# Altium PCB lm7805-power-supply.PcbDoc
Units mm, origin at the board's own origin, x right, y up, seen from the top; angles counter-clockwise.
Board outline 50 x 30 mm, 2 copper layers (Top Layer, Bottom Layer), stack 1.569 mm thick; 7 components, 4 nets, 17 pads, 2 vias.
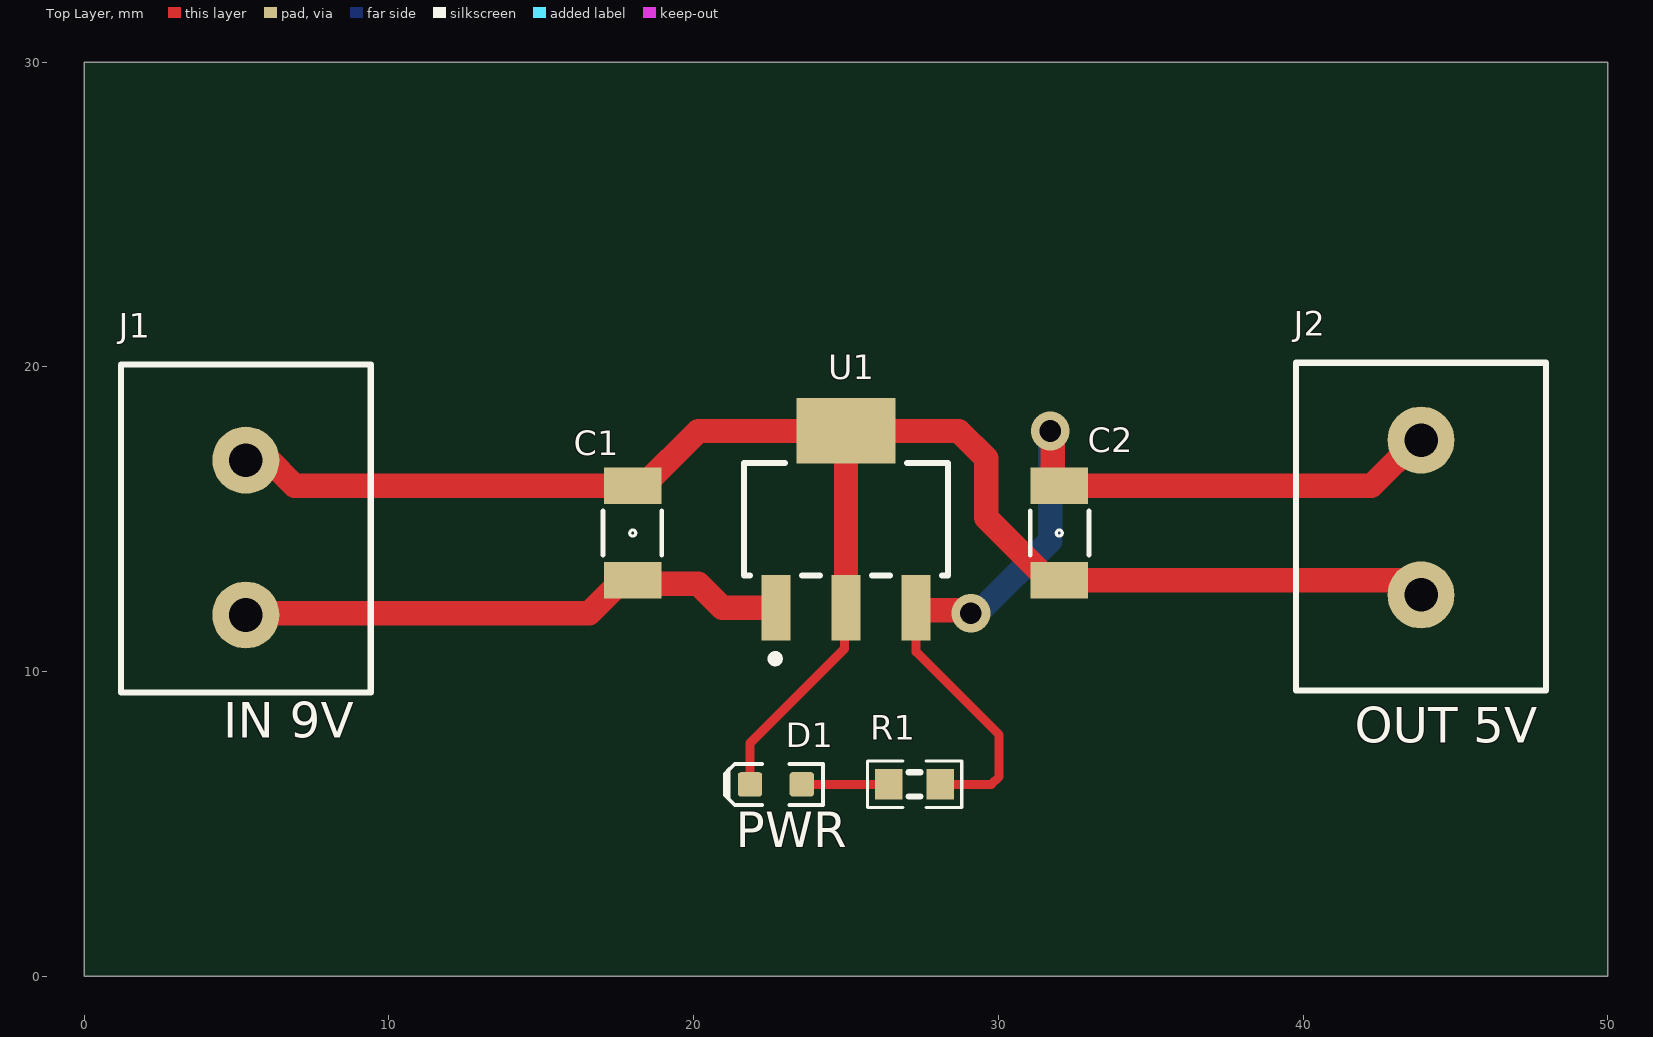
[diagram p0: Top Layer view]
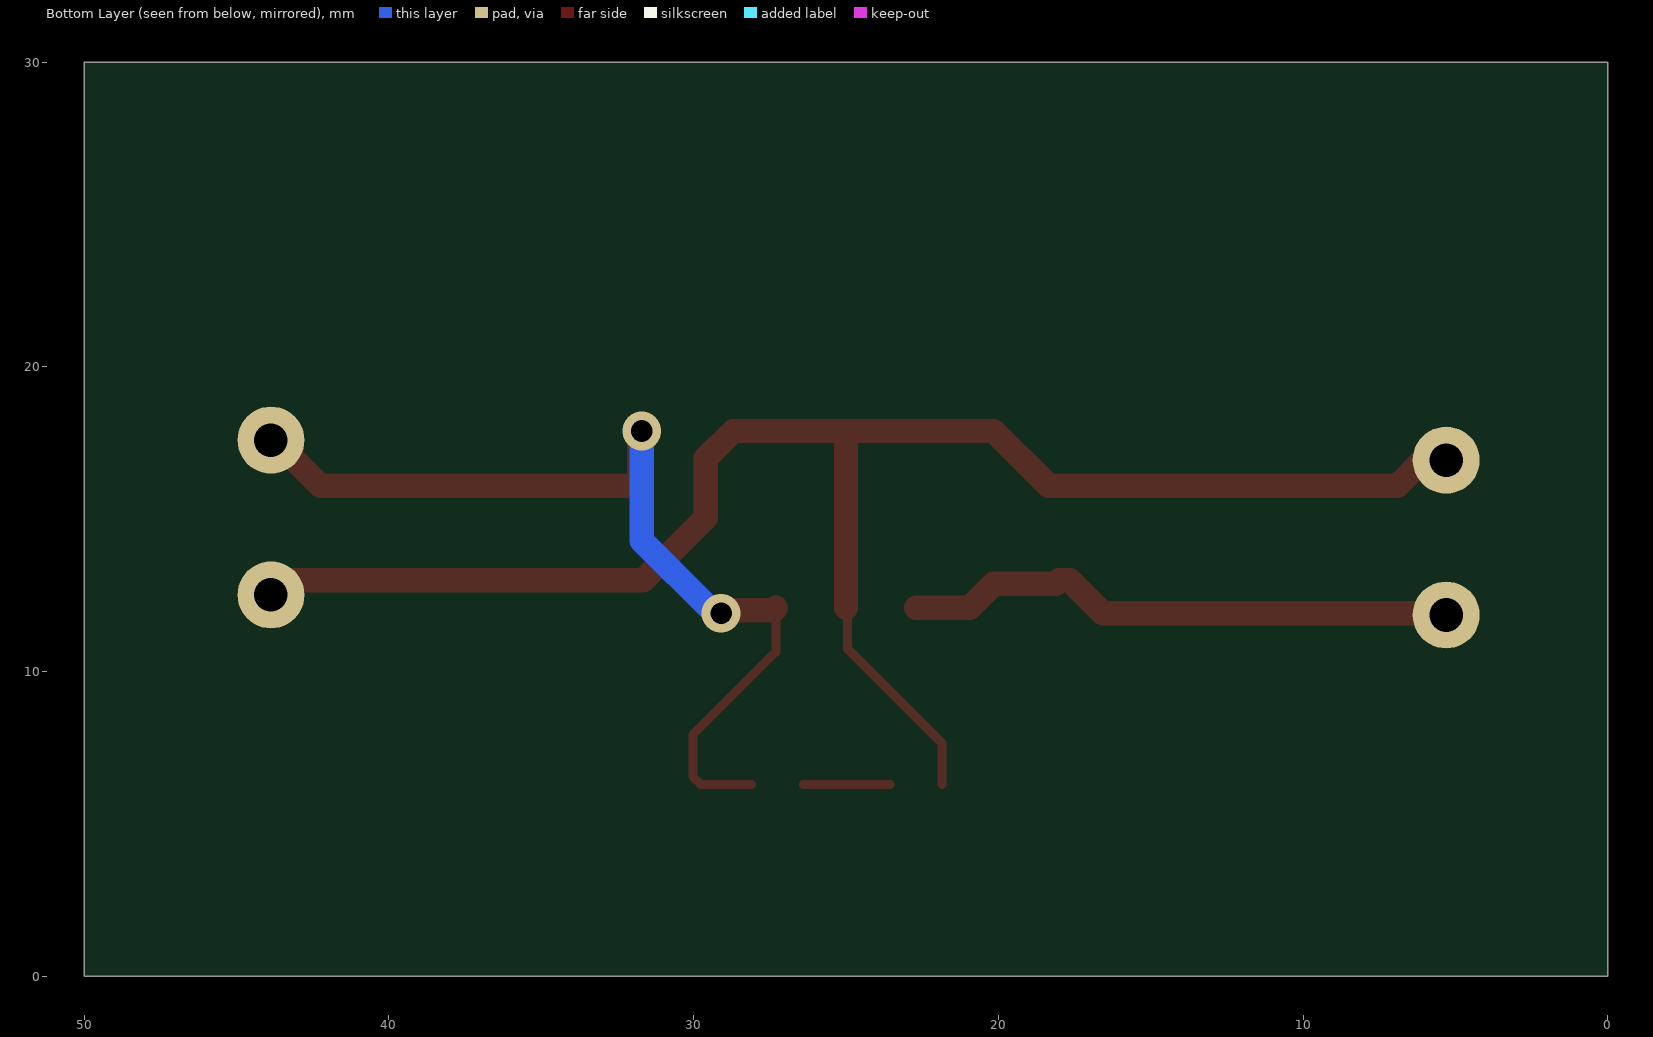
[diagram p1: Bottom Layer view, seen from below]
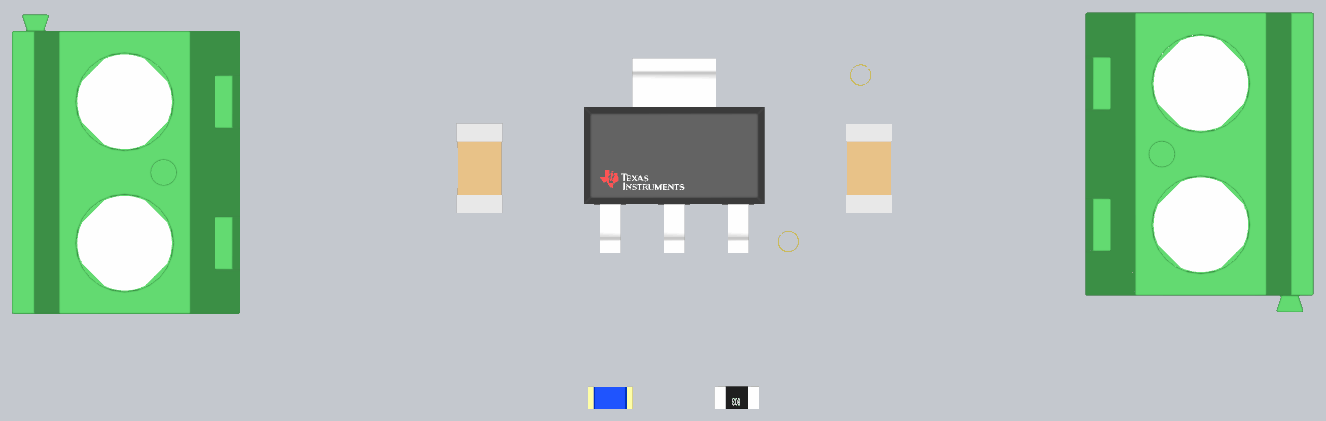
[diagram p2: 3D render of the assembled board from above, using the file's embedded part models]

## Layer stack, top to bottom
Top Solder: solder mask 0.01, Solder Resist, Dk 3.5
Top Layer: signal copper 0.035
Dielectric 1: core 1.4986, Core-043, Dk 4.3
Bottom Layer: signal copper 0.035
Bottom Solder: solder mask 0.01, Solder Resist, Dk 3.5

## Board outline
0,0 50,0 50,30 0,30

## Design rules (kind name [scope] priority, off if disabled: settings)
Clearance [All] p1: gap=0.2 ignorepadtopadclearanceinfootprint=FALSE
PolygonConnect [All] p1: connectstyle=Relief reliefconductorwidth=0.254 reliefentries=4 polygonreliefangle="90 Angle" airgapwidth=0.254
RoutingVias [All] p1: holewidth=0.711 width=1.27 viastyle="Through Hole" minholewidth=0.711 minwidth=1.27 maxholewidth=0.711 maxwidth=1.27
SilkToSolderMaskClearance [IsPad] p1: minsilkscreentomaskgap=0.1 clearancetoexposedcopper=TRUE
SolderMaskExpansion [All] p1: expansion=0.102 istentingtop=FALSE
SupplyNets "Schematic Supply Nets" [InNet('GND')] p1: voltage=0.000
Width Width_3 [InNet('+5V')] p1: maxlimit=3 minlimit=0.2 preferedwidth=0.8
Width Width_2 [InNet('+9V')] p2: maxlimit=3 minlimit=0.2 preferedwidth=0.8
Width Width_1 [InNet('GND')] p3: maxlimit=3 minlimit=0.2 preferedwidth=0.8
Width [All] p4: maxlimit=3 minlimit=0.2 preferedwidth=0.3
29 further rules are at their usual default settings.

## Components (designator, comment, footprint, x,y, rotation, side; value= is the part's Value field where it differs from the comment)
C1 "0.33u" CAP_CER_1206 18,14.55 r270 top
C2 "0.1u" CAP_CER_1206 32,14.55 r90 top
D1 "Bl 0603" LED-0603-BLUE 22.7,6.3 r180 top
J1 "PWR_IN 9V" "TE 282837-2" 5.3,14.4 r90 top
J2 "PWR_OUT 5V" "TE 282837-2" 43.873,15.06 r270 top
R1 "470" RESC1608(0603)N 27.25,6.3 r180 top
U1 "LM7805MPX/NOPB" FP-LM7805MPX-NOPB-MFG 25,15 r90 top

## Footprints (in the part's own frame and the unit in brackets; to place one, negate y for a bottom-side part, rotate by r counter-clockwise, add the part's x,y. Pads: shape width x height; smd on the part's side, far side on the other; paste and mask are expansions set on the pad)
CAP_CER_1206 [mm] "Chip Capacitor 1206 2-Leads"
  rect 1.2x1.9 smd: 1(-1.55,0) 2(1.55,0)
  silkscreen extent -0.72,-0.98 0.72,0.95, body extent -1.6,-0.82 1.6,0.82, height 1.6
FP-LM7805MPX-NOPB-MFG [mm]
  rect 2.15x0.95 smd paste+0 mask+0: 1(-2.9,2.3) 2(-2.9,0) 3(-2.9,-2.3)
  rect 2.15x3.25 smd paste+0 mask+0: 4(2.9,0)
  silkscreen extent -4.7,-3.35 1.85,3.35, body extent -4.08,-3.45 4.08,3.45, height 0.25
LED-0603-BLUE [mm]
  round 0.254 on Mech15: 0(0,0)
  rrect25% 0.8x0.8 smd: A(-0.85,0) K(0.85,0)
  Top Layer pour cut-out: -0.5,0.5 0.5,0.5 0.5,-0.5 -0.5,-0.5
  silkscreen extent -1.55,-0.68 1.68,0.68, body extent -0.8,-0.4 0.8,0.4, height 0.75
RESC1608(0603)N [mm] "Chip Resistor, Body 1.6x0.8mm, IPC Medium Density"
  rect 0.9x1 smd: 1(-0.85,0) 2(0.85,0)
  silkscreen extent -1.55,-0.76 1.55,0.76, body extent -0.8,-0.4 0.8,0.4, height 0.3
"TE 282837-2" [mm] "Wire to Board Terminal Block Horizontal with Board, 2 Postions, Body 10.76x8.2 mm, Pitch 5.08mm"
  round 2.2 hole 1.1: 1(-2.54,0) 2(2.54,0)
  silkscreen extent -5.08,-4.1 5.68,4.1, body extent -5.08,-4.1 5.68,4.1, height 10.3

## Part data
C1: library part CC1206JRX7R9BB334, "Cap Cer MLCC SMD 50V 0.33uF X7R 1206 5%", Mouser Part Number=603-CC1206JR9BB334, Package=1206, HelpURL=https://eu.mouser.com/ProductDetail/Yageo/CC1206JRX7R9BB334?qs=sGAEpiMZZMuMW9TJLBQkXoEyHUyRl0r%2FZsPy0jokCYY%3D, Manufacturer Part Number=CC1206JRX7R9BB334, Part Number=CC1206JRX7R9BB334, Price$=0.55
C2: library part C3216C0G1H104J160AA, "Cap Cer MLCC SMD 50V 0.1uF C0G NP0 1206 5%", Mouser Part Number=810-C3216C0G1H104J, Package=1206, HelpURL=https://eu.mouser.com/ProductDetail/TDK/C3216C0G1H104J160AA?qs=LcTL%2F5vFEzHiuoSy7B0Pmg%3D%3D, Manufacturer Part Number=C3216C0G1H104J160AA, Part Number=C3216C0G1H104J160AA, Price$=0.55
D1: library part 150060BS55040, "LED BLUE DIFFUSED 0603 SMD", Digi-Key Part Number=732-12013-1-ND, Package=0603, HelpURL=https://www.digikey.com/products/en?keywords=732-12013-1-ND, Manufacturer Part Number=150060BS55040, Part Number=150060BS55040
J1 J2: library part 282837-2, "TERM BLK 2P SIDE ENT 5.08MM PCB", Color=Green, Current="13.5 A", Manufacturer="TE Connectivity AMP Connectors", Supplier Part Number 1=A113320-ND, Voltage="300 V", ComponentLink1Description=Datasheet, ComponentLink1URL=https://www.te.com/commerce/DocumentDelivery/DDEController?Action=srchrtrv&DocNm=282837&DocType=Customer+Drawing&DocLang=English, ComponentLink2Description="DigiKey Link", ComponentLink2URL=https://www.digikey.com/en/products/detail/te-connectivity-amp-connectors/282837-2/2187973, Features="Interlocking (Side)", LastUpdated="21.06.2022 15:00:23", Lifecycle Status=Active, Mating Orientation="Horizontal with Board", Minimum Order=1, Mounting Type="Through Hole", Number of Levels=1, Packaging=Tray, Part Number=282837-2, Part Status=Active, Pitch="0.200\" (5.08mm)", Positions Per Level=2, Price=0.31, Series=Buchanan, Supplier 1=DigiKey, Wire Gauge="16-28 AWG", Wire Termination="Screw - Rising Cage Clamp"
R1: library part RN731JTTD4700D25, "RES SMD 0603 470  0.5% 25ppm", Mouser Part Number=660-RN731JTTD4700D25, Package=0603, HelpURL=https://eu.mouser.com/ProductDetail/KOA-Speer/RN731JTTD4700D25?qs=sGAEpiMZZMvdGkrng054tzPYU%252Blienw%2FVZ0eChuFudU%3D, Manufacturer Part Number=RN731JTTD4700D25, Part Number=RN731JTTD4700D25
U1: library part CMP-04917-000022-1, "IC REG LINEAR 5V 1.5A SOT223-4", Dropout Voltage=2V, Manufacturer="Texas Instruments", Max Junction Temp=+150°C, Max Supply Voltage=30V, Min Supply Voltage=7.5V, Nominal Supply Current=8mA, Output Current=1.5A, Output Voltage=5V, Package=SOT223-4, Temperature="0°C to +125°C", Temperature Range High=+125°C, Temperature Range Low=0°C, Accuracy Percentage=3%, Automotive=No, Category=IC, ComponentLink2Description=Datasheet, ComponentLink2URL=http://www.ti.com/lit/ds/symlink/lm7800.pdf, Device Class L1="Integrated Circuits (ICs)", Device Class L2="Power Management ICs", Device Class L3="Voltage Regulators - Linear", Digikey Description="IC REG LINEAR 5V 1.5A SOT223-4", Height=1.8mm, Lead Free=Yes, Manufacturer Part Number=LM7805MPX/NOPB, Number Of Outputs=1, Octopart=https://octopart.com/lm7805mpx%2Fnopb-texas+instruments-74629992, Output Type=Fixed, RoHS=TRUE, Standoff Height=0.02mm

## Via types
v1: diameter 1.27, hole 0.711, Top Layer to Bottom Layer, 2 vias

## Nets (pads, with @x,y where several pads share a name; then routed paths per layer and width w, separated by ;. In a path a pad name is that pad's centre, name@x,y a point inside that pad or via, vN(x,y) a via of type N, cw(c..) or ccw(c..) an arc to the next point about the centre after c; other vN are vias at no path point)
+5V: C2.2 J2.1 R1.1 U1.3 | length 32.3
  Top Layer w0.3: U1.3 27.3,10.65 30.026,7.924 30.026,6.556 29.769,6.3 R1.1
  Top Layer w0.8: U1.3 27.3,12.085 27.375,12.01 29.01,12.01 v1(29.1,11.92) ; v1(31.7,17.9) 31.79,17.81 31.79,16.3 31.99,16.1 C2.2 42.247,16.1 43.747,17.6 J2.1@44,17.6
  Bottom Layer w0.8: v1(29.1,11.92) 29.18,12 29.4,12 31.7,14.3 v1(31.7,17.9)
+9V: C1.2 J1.1 U1.1 | length 17.5
  Top Layer w0.8: J1.1@6,11.92 16.57,11.92 17.65,13 C1.2 18.113,12.887 20.15,12.887 20.937,12.1 U1.1
GND: C1.1 C2.1 D1.K J1.2 J2.2 U1.2 U1.4 | length 55.4
  Top Layer w0.3: D1.K 21.85,7.65 24.951,10.751 24.951,12.051 U1.2
  Top Layer w0.8: J1.2@6,17 6.9,16.1 C1.1 18.35,16.1 20.15,17.9 U1.4 ; U1.2 U1.4 ; J2.2@44,12.52 43.621,12.52 43.141,13 C2.1 31.65,13 29.6,15.05 29.6,17 28.7,17.9 U1.4
NetD1_A: D1.A R1.2 | length 2.9
  Top Layer w0.3: D1.A R1.2
pads on no net: D1.0

## Silkscreen, mask and mechanical layers (free items; w line width, h text height)
Top Overlay:
  text "IN 9V" at 4.555,7.443 h2
  text "OUT 5V" at 41.702,7.267 h2
  text "PWR" at 21.387,3.843 h2
Board Outline:
  the board outline again, w0.254